# Altium PCB ESP Now Communicator PCB Apr 17 2026.pcbdoc
Units mil, origin at the board's own origin, x right, y up, seen from the top; angles counter-clockwise.
Board outline 2642.91 x 4033.37 mil, 2 copper layers (Top Layer, Bottom Layer); 40 components, 40 nets, 181 pads, 62 vias.
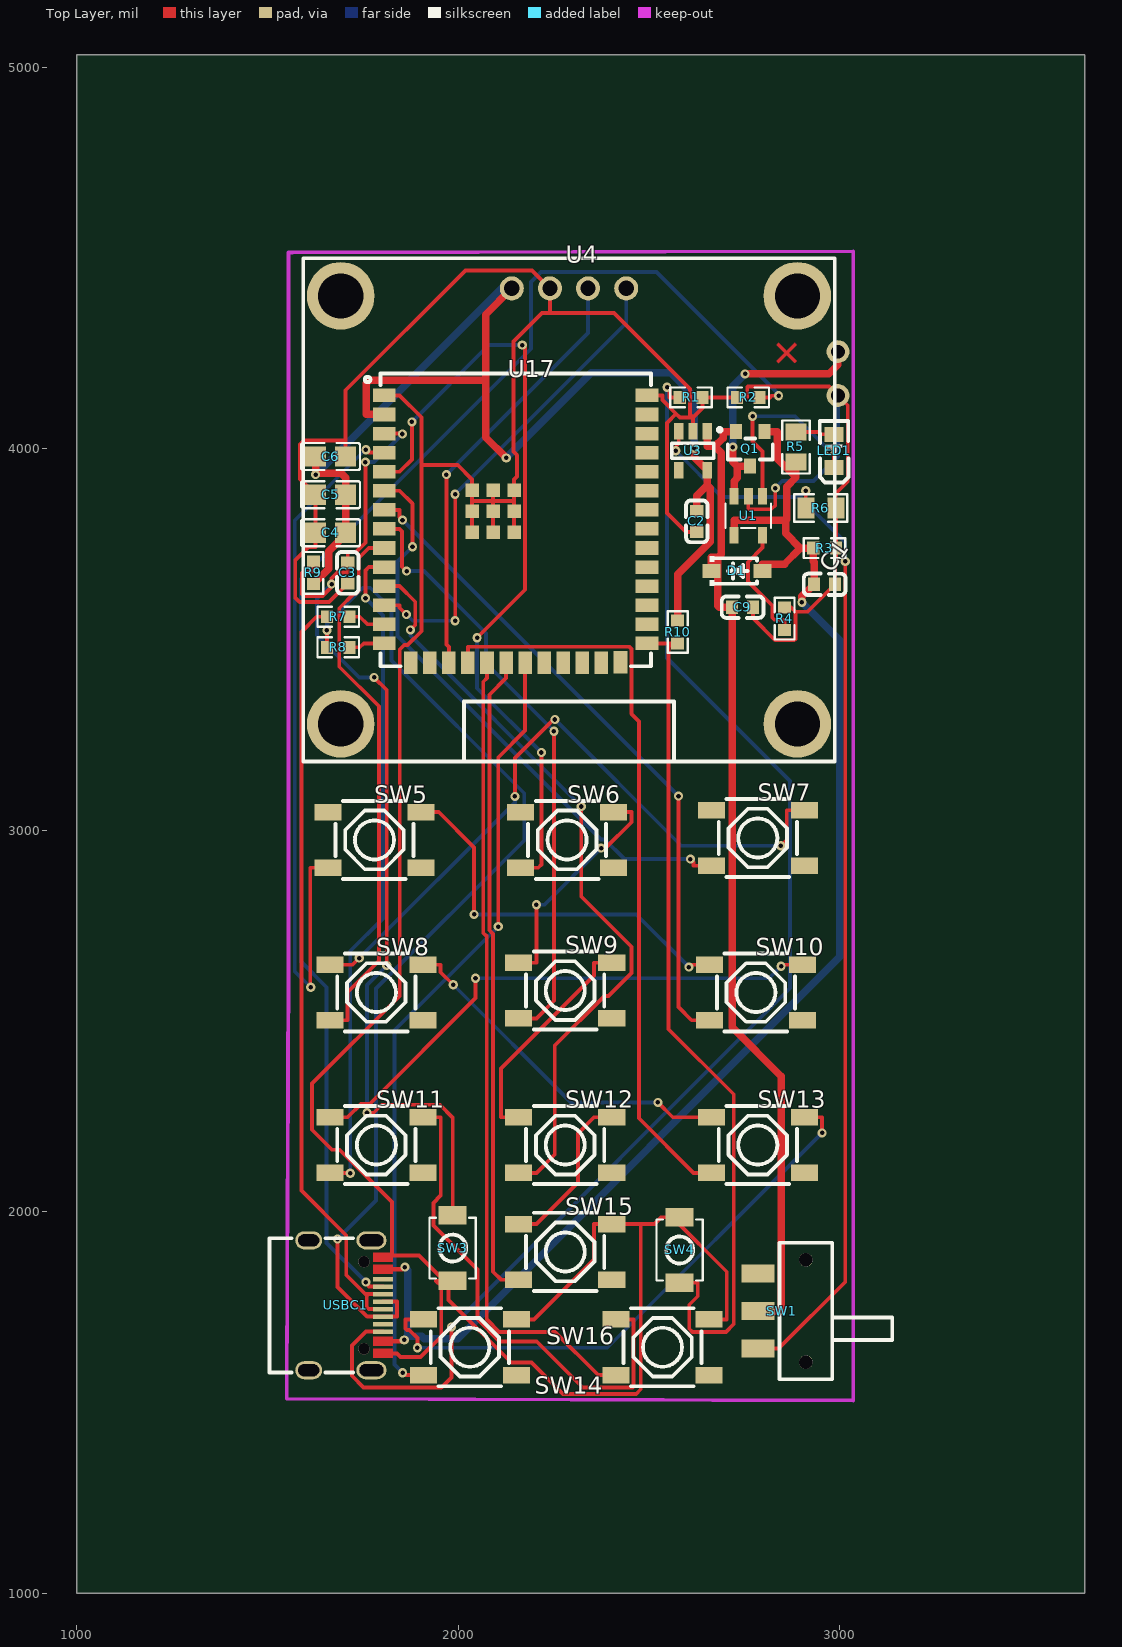
[diagram p0: Top Layer view]
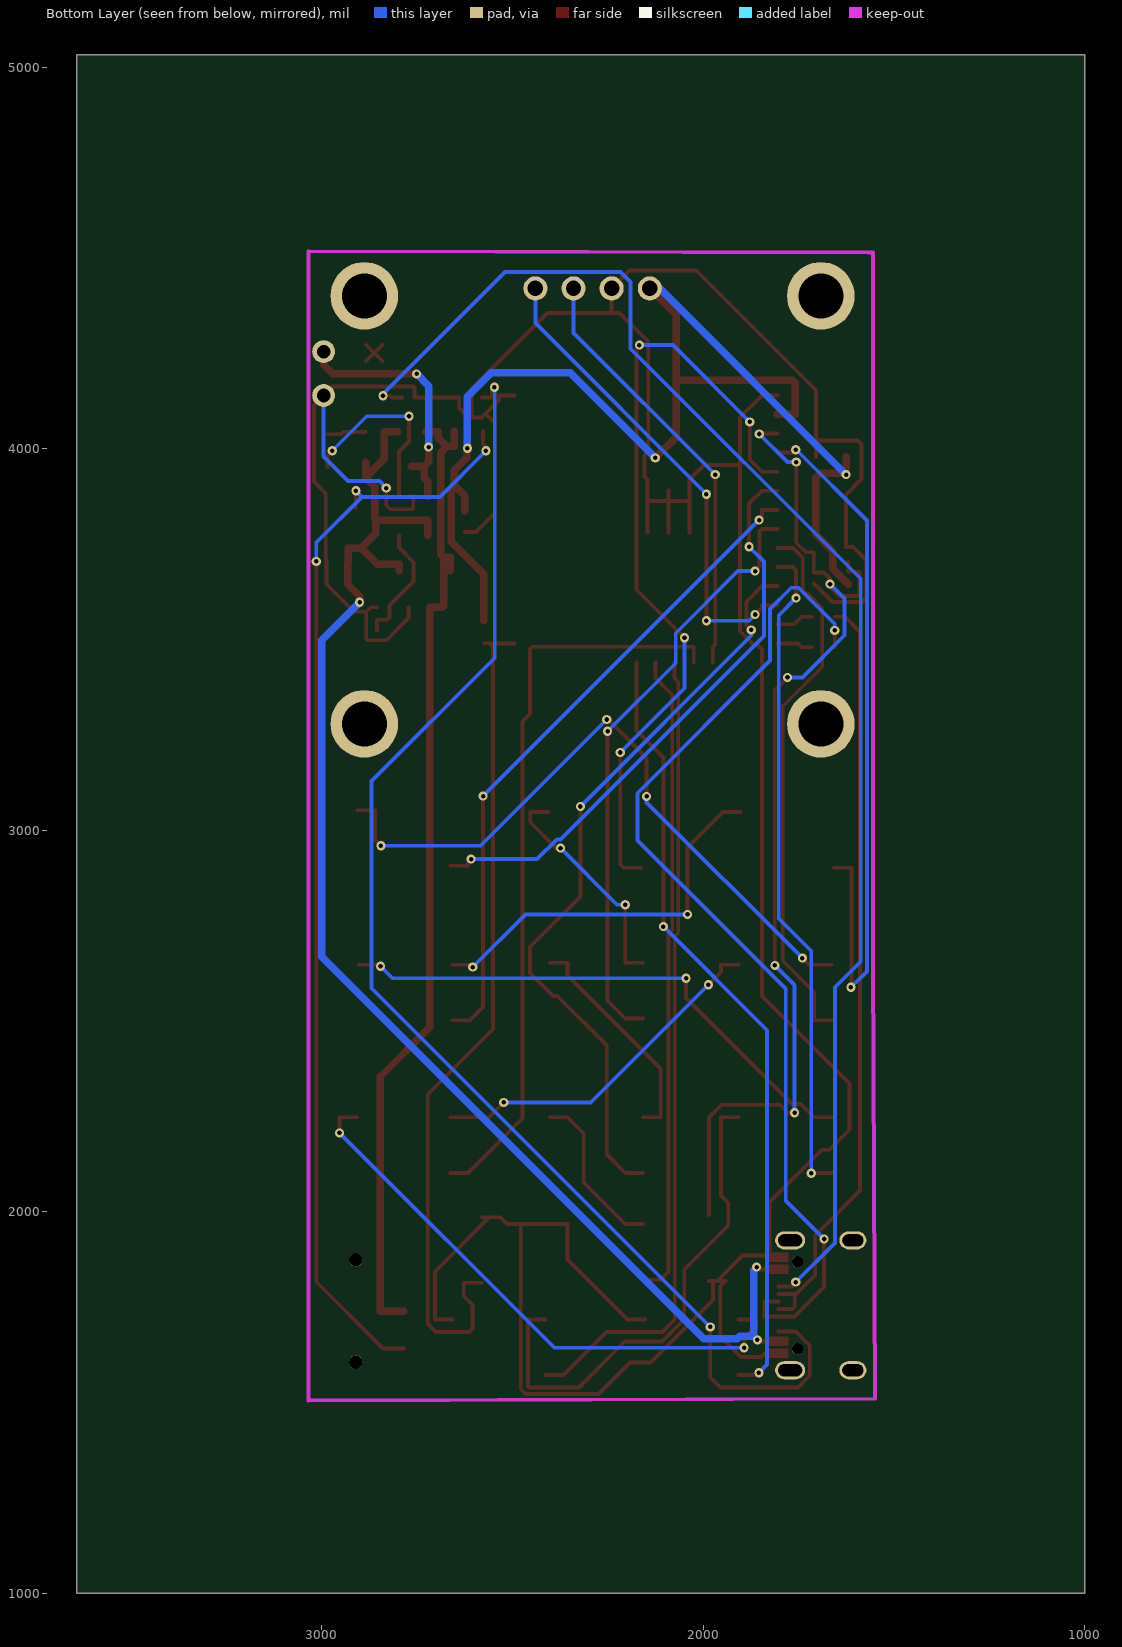
[diagram p1: Bottom Layer view, seen from below]

## Layer stack, top to bottom
Top Layer: signal copper (thickness not stored)
Dielectric: dielectric 12.6, FR-4, Dk 4.8
Bottom Layer: signal copper (thickness not stored)

## Board outline
3642.91,1000 1000,1000 1000,5033.37 3642.91,5033.37

## Components (designator, comment, footprint, x,y, rotation, side; value= is the part's Value field where it differs from the comment)
C1 "10uF" C0603 2960.55,3645 r0 top
C2 "22uF" C0603 2625.55,3810 r270 top
C3 "100nF" C0603 1710.56,3675 r90 top
C4 "10uF" C0805 1665.56,3780 r180 top
C5 "100nF" C0805 1665.56,3880 r180 top
C6 "47uF" C0805 1665.56,3980 r180 top
C9 "10uF" C0603 2745.55,3585 r0 top
D1 "B5819W_C8598" SOD-123_L2.7-W1.6-LS3.7-RD-1 2730.55,3680 r0 top
LED1 "FC-2012HRK-620D" LED0805-RD 2985.55,3995 r90 top
Q1 "AO3401A" SOT-23_L2.9-W1.3-P1.90-LS2.4-BR 2765.55,4000 r90 top
R1 "5.1kΩ" R0603 2610.55,4135 r180 top
R2 "5.1kΩ" R0603 2760.55,4135 r0 top
R3 "100kΩ" R0603 2960.55,3740 r0 top
R4 "2kΩ" R0603 2855.55,3555 r90 top
R5 "1kΩ" R0805 2885.55,4005 r90 top
R6 "100kΩ" R0805 2950.55,3845 r0 top
R7 "22Ω" R0603 1685.56,3560 r0 top
R8 "22Ω" R0603 1685.56,3480 r0 top
R9 "10kΩ" R0603 1620.56,3675 r90 top
R10 "10kΩ" R0603 2575.55,3520 r270 top
SW1 "MST-12D18G4 SPDT SLIDE SWITCH" SW-SMD_MST-12D18G4-SPDT-SLIDE-SWITCH 2785.55,1740 r90 top
SW3 "TS-1088-AR02016" SW-SMD_L3.9-W3.0-P4.45 1985.56,1905 r90 top
SW4 "TS-1088-AR02016" SW-SMD_L3.9-W3.0-P4.45 2580.55,1900 r90 top
SW5 "4*4*1.7" SW-SMD_4P-L5.2-W5.2-P3.70-LS6.5 1780.56,2975 r0 top
SW6 "4*4*1.7" SW-SMD_4P-L5.2-W5.2-P3.70-LS6.5 2285.55,2975 r0 top
SW7 "4*4*1.7" SW-SMD_4P-L5.2-W5.2-P3.70-LS6.5 2785.55,2980 r0 top
SW8 "4*4*1.7" SW-SMD_4P-L5.2-W5.2-P3.70-LS6.5 1785.56,2575 r0 top
SW9 "4*4*1.7" SW-SMD_4P-L5.2-W5.2-P3.70-LS6.5 2280.55,2580 r0 top
SW10 "4*4*1.7" SW-SMD_4P-L5.2-W5.2-P3.70-LS6.5 2780.55,2575 r0 top
SW11 "4*4*1.7" SW-SMD_4P-L5.2-W5.2-P3.70-LS6.5 1785.56,2175 r0 top
SW12 "4*4*1.7" SW-SMD_4P-L5.2-W5.2-P3.70-LS6.5 2280.55,2175 r0 top
SW13 "4*4*1.7" SW-SMD_4P-L5.2-W5.2-P3.70-LS6.5 2785.55,2175 r0 top
SW14 "4*4*1.7" SW-SMD_4P-L5.2-W5.2-P3.70-LS6.5 2030.56,1645 r0 top
SW15 "4*4*1.7" SW-SMD_4P-L5.2-W5.2-P3.70-LS6.5 2280.55,1895 r0 top
SW16 "4*4*1.7" SW-SMD_4P-L5.2-W5.2-P3.70-LS6.5 2535.55,1645 r0 top
U1 "TP4054A" SOT-23-5_L2.9-W1.6-P0.95-LS2.8-TL 2760.55,3825 r270 top
U3 "AP2112K-3.3TRG1" SOT-25-5_L2.9-W1.6-P0.95-LS2.8-BL 2615.55,3995 r180 top
U4 "1.3Inch I2C OLED MODULE" "OLED 1.3 INCH" 2290.55,3850 r0 top
U17 "ESP32-S3-WROOM-1U-N8" WIRELM-SMD_ESP32-S3-WROOM-1U 2150.55,3790 r0 top
USBC1 "TYPE-C-31-M-12" USB-C_SMD-TYPE-C-31-M-12_1 1705.56,1755 r270 top

## Footprints (in the part's own frame and the unit in brackets; to place one, negate y for a bottom-side part, rotate by r counter-clockwise, add the part's x,y. Pads: shape width x height; smd on the part's side, far side on the other; paste and mask are expansions set on the pad)
C0603 [mm]
  rect 0.8x0.9 smd paste+0 mask+0.051: 1(-0.7,0) 2(0.7,0)
  silkscreen extent -1.39,-0.71 1.39,0.71
C0805 [mm]
  rect 1.41x1.35 smd paste-100 mask+0.051: 1(-1,0) 2(1,0)
  silkscreen extent -1.96,-0.9 1.96,0.9
LED0805-RD [mm]
  rect 1x1.25 smd paste+0 mask+0.051: 1(-1.1,0) 2(1.1,0)
  silkscreen extent -2.1,-0.95 1.98,0.96
"OLED 1.3 INCH" [mm]
  round 1.6 hole 1.02 paste+0 mask+0.102: 1(-3.81,14.5) 2(-1.27,14.5) 3(1.27,14.5) 4(3.81,14.5)
  round 4.5 hole 3 paste+0 mask+0.102: 5(-15.2,14) 6(15.2,14) 7(-15.2,-14.5) 8(15.2,-14.5)
  silkscreen extent -17.7,-17 17.7,16.5
R0603 [mil]
  rect 31.75x34.02 smd paste-3937.01 mask+2: 1(-29.66,0) 2(29.65,0)
  silkscreen extent -55,-26 55,26
R0805 [mil]
  rect 44.59x54.21 smd paste-3937.01 mask+2: 1(-39.37,0) 2(39.37,0)
  silkscreen extent -69,-36 69,36
SOD-123_L2.7-W1.6-LS3.7-RD-1 [mm]
  rect 1.2x0.95 smd paste+0 mask+0.051: 1(-1.7,0) 2(1.7,0)
  silkscreen extent -1.81,-0.98 1.35,0.98
SOT-23-5_L2.9-W1.6-P0.95-LS2.8-TL [mm]
  rect 1.1x0.6 smd paste+0 mask+0.05: 1(-1.3,0.95) 2(-1.3,0) 3(-1.3,-0.95) 4(1.3,-0.95) 5(1.3,0.95)
  silkscreen extent -0.81,-1.51 0.82,1.51
SOT-23_L2.9-W1.3-P1.90-LS2.4-BR [mm]
  rect 1x0.8 smd paste+0 mask+0.051: 1(1.15,-0.95) 2(1.15,0.95) 3(-1.15,0)
  silkscreen extent -0.7,-1.5 0.7,1.5
SOT-25-5_L2.9-W1.6-P0.95-LS2.8-BL [mil]
  rect 24.5x43.5 smd paste+0 mask+2: 1(-37.39,-51.18) 2(-0.03,-51.18) 3(37.39,-51.18) 4(37.39,51.18) 5(-37.39,51.18)
  silkscreen extent -75,-60 56,20
SW-SMD_4P-L5.2-W5.2-P3.70-LS6.5 [mm]
  rect 1.8x1.1 smd paste+0 mask+0.051: 1(-3.1,1.85) 2(3.1,1.85) 3(-3.1,-1.85) 4(3.1,-1.85)
  silkscreen extent -2.6,-2.6 2.6,2.6
SW-SMD_L3.9-W3.0-P4.45 [mm]
  rect 1.23x1.86 smd paste+0 mask+0.051: 1(-2.185,0) 2(2.185,0)
  silkscreen extent -2.03,-1.54 2.03,1.54
SW-SMD_MST-12D18G4-SPDT-SLIDE-SWITCH [mm]
  rect 1.2x2.2 smd paste+0 mask+0.051: 1(-2.5,0) 2(0,0) 3(2.5,0)
  round 0.9 hole 0.9 unplated paste+0: ""(-3.4,-3.2) ""(3.4,-3.2)
  silkscreen extent -4.55,-8.95 4.55,-1.45
USB-C_SMD-TYPE-C-31-M-12_1 [mm]
  oval 1.2x2 hole 0.8 slot 1.6 at 90 deg paste+0 mask+0.051: 1(4.325,1.706) 4(-4.325,1.706)
  oval 1.2x1.8 hole 0.8 slot 1.4 at 90 deg paste+0 mask+0.051: 2(4.325,-2.474) 3(-4.325,-2.474)
  rect 0.3x1.3 smd paste-100 mask+0.051: A5(-1.25,2.474) A6(-0.25,2.474) A7(0.25,2.474) A8(1.25,2.474) B5(1.75,2.474) B6(0.75,2.474) B7(-0.75,2.474) B8(-1.75,2.474)
  round 0.75 hole 0.75 unplated paste+0: ""(-2.9,1.205) ""(2.9,1.205)
  Top Layer region: -2.9,1.824 -2.9,3.124 -2.9,3.124 -3.2,3.124 -3.2,3.124 -3.2,3.124 -3.2,3.124 -3.5,3.124 -3.5,3.124 -3.5,1.824 -3.5,1.824 -3.2,1.824 -3.2,1.824 -3.2,1.824 -3.2,1.824
  Top Layer region: 2.9,3.124 2.9,1.824 2.9,1.824 3.2,1.824 3.2,1.824 3.2,1.824 3.2,1.824 3.5,1.824 3.5,1.824 3.5,3.124 3.5,3.124 3.2,3.124 3.2,3.124 3.2,3.124 3.2,3.124
  Top Layer region: 2.7,1.824 2.7,3.124 2.7,3.124 2.4,3.124 2.4,3.124 2.4,3.124 2.4,3.124 2.1,3.124 2.1,3.124 2.1,1.824 2.1,1.824 2.4,1.824 2.4,1.824 2.4,1.824 2.4,1.824
  Top Layer region: -2.1,1.824 -2.1,3.124 -2.1,3.124 -2.4,3.124 -2.4,3.124 -2.4,3.124 -2.4,3.124 -2.7,3.124 -2.7,3.124 -2.7,1.824 -2.7,1.824 -2.4,1.824 -2.4,1.824 -2.4,1.824 -2.4,1.824
  silkscreen extent -4.47,-5.09 4.47,0.49
WIRELM-SMD_ESP32-S3-WROOM-1U [mm]
  rect 1.5x0.9 smd paste+0 mask+0.05: 1(-8.75,8.895) 2(-8.75,7.625) 3(-8.75,6.355) 4(-8.75,5.085) 5(-8.75,3.815) 6(-8.75,2.545) 7(-8.75,1.275) 8(-8.75,0.005) 9(-8.75,-1.265) 10(-8.75,-2.535) 11(-8.75,-3.805) 12(-8.75,-5.075) 13(-8.75,-6.345) 14(-8.75,-7.615) 27(8.75,-7.615) 28(8.75,-6.345) 29(8.75,-5.075) 30(8.75,-3.805) 31(8.75,-2.535) 32(8.75,-1.265) 33(8.75,0.005) 34(8.75,1.275) 35(8.75,2.545) 36(8.75,3.815) 37(8.75,5.085) 38(8.75,6.355) 39(8.75,7.625) 40(8.75,8.895)
  rect 0.9x1.5 smd paste+0 mask+0.05: 15(-6.985,-8.895) 16(-5.715,-8.895) 17(-4.445,-8.895) 18(-3.175,-8.895) 19(-1.905,-8.895) 20(-0.635,-8.895) 21(0.635,-8.895) 22(1.905,-8.895) 23(3.175,-8.895) 24(4.445,-8.895) 25(5.715,-8.895) 26(6.985,-8.865)
  rect 0.9x0.9 smd paste+0 mask+0.051: 41(-2.9,-0.225) 41(-2.9,1.175) 41(-2.9,2.575) 41(-1.501,-0.225) 41(-1.501,1.175) 41(-1.501,2.575) 41(-0.1,-0.225) 41(-0.1,1.175) 41(-0.1,2.575)
  silkscreen extent -10.04,-9.14 9.02,10.36

## Free pads (board coordinates)
  round 60 hole 36 paste+0 mask+2: 1(2995.55,4255) 2(2995.55,4140)

## Via types
v1: diameter 24.02, hole 12.01, Top Layer to Bottom Layer, tented both sides, 54 vias
v2: diameter 24.02, hole 11.81, Top Layer to Bottom Layer, tented both sides, 8 vias

## Nets (pads, with @x,y where several pads share a name; then routed paths per layer and width w, separated by ;. In a path a pad name is that pad's centre, name@x,y a point inside that pad or via, vN(x,y) a via of type N, cw(c..) or ccw(c..) an arc to the next point about the centre after c; other vN are vias at no path point)
+5V: C1.1 D1.2 Q1.1 R3.1 R5.1 U1.4 | length 3761.4
  Top Layer w11.81: 1802.95,1660.5 1854.72,1660.5 v2(1858.64,1664.42) ; 1802.96,1849.49 1855.05,1849.49 v2(1860.56,1855)
  Top Layer w19.68: U1.4 2723.16,3793.51 2723.16,3813.2 2858.72,3813.2 ; D1.2 2797.49,3698.22 2855.51,3698.22 2897.3,3740 ; Q1.1 2836.43,4045.28 2836.43,3974.72 2885.55,3925.6 ; R5.1 2885.55,3925.6 ; v2(2901.18,3597.8) 2901.18,3613.19 C1.1 2932.99,3703.16 2930.89,3705.26 R3.1 2897.3,3740 ; 2858.72,3813.2 2861.2,3815.68 2861.2,3901.24 2885.55,3925.6 ; 2858.72,3813.2 2858.72,3778.58 2897.3,3740
  Bottom Layer w19.68: v2(1858.64,1664.42) 1868.37,1674.14 ; v2(1860.56,1855) 1868.36,1847.19 1868.36,1674.14 ; v2(2901.18,3597.8) 3000.7,3498.29 3000.7,2668.75 1999.54,1667.59 1911.4,1667.59 1904.86,1674.14 1868.37,1674.14
BATTERY+: pad.1 Q1.3 U1.3 | length 663.7
  Top Layer w19.68: v2(2720.36,4004.86) 2720.36,3966.43 2732.07,3954.72 ; U1.3 2723.16,3915.56 2732.07,3924.48 2732.07,3954.72 ; v2(2752.01,4196.47) 2972.07,4196.47 2995.55,4219.96 pad.1 ; Q1.3 2739.97,3954.72 2734.05,3954.72 2733.07,3954.72 2732.07,3954.72
  Bottom Layer w19.68: v2(2720.36,4004.86) 2720.36,4164.82 v2(2752.01,4196.47)
BTN1: SW5.3 U17.4 | length 1916.4
  Top Layer w10: v1(1613.35,2588.58) 1612.09,2589.84 1612.09,2902.17 SW5.3 ; v1(1758.04,3997.77) 1765.55,3990.26 1765.55,3990.2 U17.4
  Bottom Layer w10: v1(1613.35,2588.58) 1571.52,2630.41 1571.52,3812.72 1756.57,3997.77 v1(1758.04,3997.77)
BTN2: SW6.3 U17.5 | length 2101.9
  Top Layer w10: U17.5 1846.59,3940.2 1878.58,3972.19 v1(1878.58,4070.8) ; v1(2049.66,3504.92) 2175.39,3630.66 2175.39,4264.6 v1(2167.78,4272.22) ; SW6.3 2209.93,2902.17 2218.12,2910.36 v1(2218.12,3204.08)
  Bottom Layer w10: v1(1878.58,4070.8) 2079.99,4272.22 v1(2167.78,4272.22) ; v1(2049.66,3504.92) 2049.66,3372.55 v1(2218.12,3204.08)
BTN3: SW7.3 U17.6 | length 1528.6
  Top Layer w10: U17.6 1846.59,3890.2 1880.36,3856.43 v1(1880.36,3743.59) ; v1(2608.93,2924.76) 2617.09,2916.6 2617.09,2907.17 SW7.3
  Bottom Layer w10: v1(1880.36,3743.59) 1841.26,3704.49 1841.26,3509.54 2374.34,2976.45 2384.14,2976.45 2435.84,2924.76 v1(2608.93,2924.76)
BTN4: SW10.3 U17.7 | length 1742.1
  Top Layer w10: U17.7 1846.59,3840.2 1846.59,3820.85 v1(1854.11,3813.33) ; v1(2577.61,3089.82) 2577.61,2536.64 2612.09,2502.17 SW10.3
  Bottom Layer w10: v1(1854.11,3813.33) v1(2577.61,3089.82)
BTN5: SW9.3 U17.8 | length 1583.2
  Top Layer w10: U17.8 1846.59,3790.2 1853.13,3783.65 1853.13,3691.13 v1(1864.66,3679.6) ; SW9.3 2204.93,2507.17 2251.09,2553.33 v1@2251.09,3259.65
  Bottom Layer w10: v1(1864.66,3679.6) 1910.03,3679.6 2072.72,3516.91 2072.72,3438.03 v1@2251.09,3259.65
  other v1: 2251.09,3259.65
BTN6: SW8.3 U17.9 | length 1437.6
  Top Layer w10: SW8.3 1709.93,2502.17 1709.93,2575.82 1792.12,2658 1792.12,3325.18 1688.29,3429.01 1688.29,3582.13 1726.66,3620.51 1732.72,3620.51 1739.38,3627.16 1739.38,3714.03 1765.55,3740.2 U17.9
BTN7: SW11.3 U17.10 | length 1741.7
  Top Layer w10: SW11.3 1709.93,2102.17 1711.09,2101.02 v1(1717.21,2101.02) ; v1(1756.98,3608.83) 1756.98,3681.64 1765.55,3690.2 U17.10
  Bottom Layer w10: v1(1717.21,2101.02) 1717.21,2683.63 1802.6,2769.01 1802.6,3563.22 v1(1756.98,3608.83)
BTN8: SW12.3 U17.11 | length 1997.2
  Top Layer w10: U17.11 1846.59,3640.2 1887.44,3599.34 1887.44,3538.26 v1(1874.64,3525.46) ; SW12.3 2204.93,2102.17 2253.2,2150.44 2253.2,2435.92 2383.18,2565.89 2394.47,2565.89 2454.24,2625.66 2454.24,2694.85 2322.55,2826.55 v1(2322.55,3062.61)
  Bottom Layer w10: v1(1874.64,3525.46) 1874.64,3510.51 v1(2322.55,3062.61)
BTN9: SW13.3 U17.18 | length 1959.3
  Top Layer w10: U17.18 2025.56,3480.32 2026.81,3481.57 2447.86,3481.57 2454.32,3475.1 2454.32,3305.48 2474.07,3285.73 2474.07,2245.18 2617.09,2102.17 SW13.3
BTN10: SW16.3 U17.19 | length 2128.8
  Top Layer w10: U17.19 2075.55,3399.28 2065.78,3389.51 2065.78,2731.35 2075.14,2722 2075.14,1717.43 2107.43,1685.13 2254.12,1685.13 2367.09,1572.17 SW16.3
BTN11: SW15.3 U17.20 | length 1694.7
  Top Layer w10: U17.20 2125.55,3399.28 2081.84,3355.56 2081.84,2738 2091.18,2728.65 2091.18,1843.07 2112.09,1822.17 SW15.3
BTN12: SW14.3 U17.21 | length 2068.9
  Top Layer w10: v1(1854.48,1578.07) 1856.18,1578.07 1862.09,1572.17 SW14.3 ; v1(2104.89,2747.55) 2104.89,3190.85 2175.55,3261.51 U17.21
  Bottom Layer w10: v1(1854.48,1578.07) 1833.14,1599.41 1833.14,2475.8 v1(2104.89,2747.55)
DISPLAY_SCL: U4.3 U17.17 | length 1137.7
  Top Layer w10: v1(1969.05,3932.52) 1969.05,3486.83 1975.56,3480.32 U17.17
  Bottom Layer w10: v1(1969.05,3932.52) 2340.57,4304.04 U4.3
DISPLAY_SDA: U4.4 U17.12 | length 1264
  Top Layer w10: U17.12 1846.59,3590.2 1846.59,3583.61 v1(1864.38,3565.81) ; v1@1992.11,3549.45 v1(1992.11,3881.22)
  Bottom Layer w10: v1(1864.38,3565.81) 1880.74,3549.45 v1@1992.11,3549.45 ; v1(1992.11,3881.22) 2440.57,4329.68 U4.4
  other v1: 1992.11,3549.45
GND: C1.2 C2.2 C3.1 C4.2 C5.2 C6.1 C9.2 pad.2 R1.1 R2.1 R3.2 R4.2 R6.2 SW3.1 SW4.2 SW14.2 SW15.2 SW16.2 U1.2 U3.2 U4.2 U17.1 U17.40 U17.41 | length 10965.9
  Top Layer w10: C6.1 1704.92,3998.79 1704.92,4022 ; C3.1 1661.81,3598.69 1584.46,3598.69 1572.68,3610.47 1572.68,3707.72 1607.4,3742.44 1626.18,3742.44 C4.2 C5.2 1585.38,3920.81 1585.38,4012 1595.38,4022 1704.92,4022 ; 1802.95,1629.01 1839.55,1629.01 1849.11,1619.45 1901.64,1619.45 1955.82,1673.62 1955.82,1805.09 1941.92,1818.98 SW3.1@1963.74,1818.98 ; 1802.95,1880.98 1821.91,1880.98 1826.34,1885.4 ; U17.1 1846.59,4140.2 1903.78,4083.01 1903.78,3957.76 ; SW3.1 SW3.1@1974.65,1818.98 ; U17.41@2036.38,3781.14 2036.38,3836.25 2036.38,3863.81 ; U17.41@2091.49,3781.13 2091.49,3836.25 2091.49,3863.81 ; U17.41@2091.49,3891.37 2091.49,3863.81 ; U17.41@2146.61,3781.14 2146.61,3836.25 2146.61,3863.81 ; SW14.2 2175.82,1717.84 2199.03,1717.84 2356.18,1874.99 2356.18,1967.84 SW15.2 2478.78,1967.84 ; U17.40 2535.57,4140.2 2535.57,4127.93 2571.16,4092.34 ; SW4.2 SW4.2@2560.72,1986.02 ; U3.2 2615.59,4075.87 2615.59,4082.37 ; C2.2 2596.84,3782.44 2547.14,3832.14 2547.14,4068.33 2571.16,4092.34 ; SW16.2 2704.03,1717.84 2704.03,1842.72 SW4.2@2560.72,1986.02 ; U1.2 2760.55,3843.54 2762.47,3841.63 2820.82,3841.63 2831.45,3852.26 v1(2831.45,3897.38) ; C9.2 2773.11,3556.29 2830.99,3498.41 2881.05,3498.41 2883.95,3501.32 2883.95,3572.9 ; R4.2 2872.2,3584.66 2883.95,3572.9 ; R6.2 R6.2@2989.93,3864.05 ; 1704.92,4022 1704.92,4153.92 2018.82,4467.81 2193.62,4467.81 U4.2 2240.57,4356.62 ; 1826.34,1885.4 1826.34,2025.43 1689.02,2162.75 1669.63,2162.75 1617.02,2215.37 1617.02,2336.19 1846.79,2565.96 1846.79,3473.91 1858.62,3485.74 1867.55,3485.74 1903.78,3521.97 1903.78,3957.76 ; 1826.34,1885.4 1897.33,1885.4 SW3.1@1963.74,1818.98 ; 1903.78,3957.76 1998.69,3957.76 2036.38,3920.08 2036.38,3891.37 2036.38,3863.81 ; SW3.1@1963.74,1818.98 SW3.1@1974.65,1818.98 ; SW3.1@1974.65,1818.98 1974.65,1769.21 2138.99,1604.87 2192.61,1604.87 2274.74,1522.73 2466.8,1522.73 2478.78,1534.72 2478.78,1967.84 ; 2036.38,3863.81 2091.49,3863.81 ; 2091.49,3863.81 2146.61,3863.81 ; 2146.61,3863.81 2146.61,3891.37 2146.61,3920.08 2154.47,3927.93 2154.47,3983.59 2144.72,3993.34 2144.72,4281.77 2219.57,4356.62 2240.57,4356.62 ; 2240.57,4356.62 2408.32,4356.62 2607.84,4157.1 2607.84,4090.12 2615.59,4082.37 ; 2478.78,1967.84 2514.78,1967.84 2532.95,1986.02 SW4.2@2560.72,1986.02 ; 2571.16,4092.34 2581.12,4082.37 2615.59,4082.37 ; 2615.59,4082.37 2640.22,4107 R1.1 R2.1 2757.76,4135 2757.76,4161.87 2759.22,4163.33 2972.22,4163.33 pad.2 3021.22,4114.34 3021.22,3914.39 2989.93,3883.1 R6.2@2989.93,3864.05 ; 2883.95,3572.9 2916.01,3572.9 C1.2 2988.11,3709.9 2990.22,3712 R3.2 2990.22,3863.76 R6.2@2989.93,3864.05
  Bottom Layer w10: v1(2831.45,3897.38) 2849.57,3915.5 2931.64,3915.5 2996.09,3979.94 2996.09,4139.47 pad.2
LED1_2: LED1.2 R5.2 | length 102.5
  Top Layer w10: R5.2 2943.89,4044.37 2949.95,4038.31 LED1.2
R7_2: R7.2 U17.13 | length 99.1
  Top Layer w10: R7.2 1742.08,3560 1761.88,3540.2 U17.13
R8_2: R8.2 U17.14 | length 95.1
  Top Layer w10: R8.2 1742.08,3480 1752.28,3490.2 U17.14
R9_2: C3.2 R9.2 SW3.2 U17.3 | length 2794.5
  Top Layer w10: R9.2 1620.56,3677.79 1593.68,3677.79 1590.56,3674.66 1590.56,3619.83 1595.63,3614.75 1644.62,3614.75 1668.12,3638.25 v1(1668.12,3645.54) 1668.12,3660.13 1683.82,3675.82 1710.56,3675.82 C3.2 1710.56,3708.54 1710.56,3729.3 1731.92,3729.3 1756.8,3754.17 v1(1756.8,3965.39) ; v1(1760.92,2259.77) 1778.69,2259.77 1799.47,2280.55 1952.1,2280.55 1985.56,2247.09 SW3.2 ; v1(1779.54,3401.01) 1812.78,3367.77 v1@1812.78,2646.05 ; U17.3 1852.56,4040.2 v1(1853.67,4039.08)
  Bottom Layer w10: v1(1668.12,3645.54) 1630.19,3607.61 1630.19,3511.39 1740.58,3401.01 v1(1779.54,3401.01) ; v1(1756.8,3965.39) 1779.98,3965.39 v1(1853.67,4039.08) ; v1(1760.92,2259.77) 1760.92,2594.2 v1@1812.78,2646.05
  other v1: 1812.78,2646.05
R10_2: R10.2 SW4.1 U17.27 | length 2246.1
  Top Layer w10: U17.27 2547.41,3490.2 2547.55,3490.34 R10.2@2561.55,3490.34 ; R10.2 R10.2@2561.55,3490.34 ; SW4.1 2628.16,1813.98 2628.16,1778.78 2605.64,1756.27 2605.64,1693.5 2614.01,1685.13 2701.8,1685.13 2722.45,1705.79 2722.45,2308.07 2551.76,2478.77 2551.76,3480.54 R10.2@2561.55,3490.34
SW5_2: SW5.2 SW10.1 | length 1029.5
  Top Layer w10: SW5.2 1949.03,3047.84 2041.64,2955.22 v1(2041.64,2779.68) ; v1(2604.84,2641.67) 2611.01,2647.84 SW10.1
  Bottom Layer w10: v1(2041.64,2779.68) 2466.84,2779.68 v1(2604.84,2641.67)
SW6_2: SW6.2 SW9.1 | length 610.3
  Top Layer w10: SW9.1 2204.93,2652.84 v1(2204.93,2804.98) ; v1(2374.59,2953.39) 2386.2,2953.39 2454.03,3021.21 2454.03,3047.84 SW6.2
  Bottom Layer w10: v1(2204.93,2804.98) 2226.18,2804.98 v1(2374.59,2953.39)
SW7_2: SW7.2 SW8.1 | length 1800.1
  Top Layer w10: SW8.1 1723.37,2647.84 v1(1740.68,2665.16) ; v1(2148.84,3089.02) 2148.84,3190.01 2249.51,3290.67 v1(2253.57,3290.67) ; v1(2845.47,2959.47) 2861.18,2975.18 2861.18,3052.84 SW7.2
  Bottom Layer w10: v1(1740.68,2665.16) 2148.84,3073.32 v1(2148.84,3089.02) ; v1(2253.57,3290.67) 2584.78,2959.47 v1(2845.47,2959.47)
SW8_2: SW8.2 SW13.1 | length 933.1
  Top Layer w10: SW8.2 1954.03,2647.84 1954.03,2628.17 v1(1986.92,2595.27) ; v1(2523.47,2286.8) 2562.43,2247.84 SW13.1
  Bottom Layer w10: v1(1986.92,2595.27) 2295.39,2286.8 v1(2523.47,2286.8)
SW9_2: SW9.2 SW12.1 | length 599
  Top Layer w10: SW12.1 2112.09,2247.84 2112.09,2375.38 2356.18,2619.47 2356.18,2652.84 SW9.2
SW10_2: SW10.2 SW11.1 | length 1435.4
  Top Layer w10: SW11.1 1709.93,2247.84 1744.92,2282.83 1768.03,2282.83 2045.46,2560.27 v1(2045.46,2612.5) ; v1(2846.45,2643.95) 2852.28,2643.95 2856.18,2647.84 SW10.2
  Bottom Layer w10: v1(2045.46,2612.5) 2814.99,2612.5 v1(2846.45,2643.95)
SW11_2: SW11.2 SW16.1 | length 1338.6
  Top Layer w10: SW11.2 1954.03,2247.84 1954.1,2247.77 1954.1,2042.47 1934.99,2023.37 1934.99,1963.87 2050.34,1848.52 2050.34,1718.24 2108.74,1659.85 2206.07,1659.85 2326.47,1539.46 2457.09,1539.46 2460.01,1542.37 2460.01,1717.77 2459.93,1717.84 SW16.1
SW12_2: SW12.2 SW15.1 | length 435.5
  Top Layer w10: SW15.1 2204.93,1967.84 2313.91,2076.81 2313.91,2205.57 2356.18,2247.84 SW12.2
SW13_2: SW13.2 SW14.1 | length 1518.7
  Top Layer w10: v1(1893.23,1643.67) 1893.23,1668.96 1871.58,1690.62 1864.99,1690.62 1862.09,1693.53 1862.09,1717.84 SW14.1 ; SW13.2 2954.03,2247.84 v1(2954.03,2207.02)
  Bottom Layer w10: v1(1893.23,1643.67) 2390.68,1643.67 v1(2954.03,2207.02)
U1_1: LED1.1 U1.1 | length 507.3
  Top Layer w10: v1(2771.74,4085.39) 2771.74,4019.76 2797.95,3993.54 U1.1 ; v1(2973.01,3995) 2985.55,3982.46 LED1.1
  Bottom Layer w10: v1(2771.74,4085.39) 2882.62,4085.39 v1(2973.01,3995)
U1_5: R4.1 U1.5 | length 319.7
  Top Layer w10: U1.5 2797.95,3741.17 2759.76,3702.98 2759.76,3652.5 2823.18,3589.09 2823.18,3557.72 2828.68,3552.21 2855.55,3552.21 R4.1
U3_3: R6.1 SW1.1 U3.3 | length 2906.3
  Top Layer w10: v1(2570.2,3995) 2570.2,4005.48 2578.16,4013.44 U3.3 ; SW1.1 2839.84,1641.58 3014.93,1816.66 v1(3014.93,3705) ; R6.1 v1(2911.18,3890.17)
  Bottom Layer w10: v1(2570.2,3995) 2690.89,3874.32 2895.34,3874.32 ; v1(2911.18,3890.17) 2895.34,3874.32 ; v1(3014.93,3705) 3014.93,3754.73 2895.34,3874.32
USB-C+: R8.1 USBC1.A6 USBC1.B6 | length 2680.9
  Top Layer w10: R8.1 1655.89,3508 v1(1655.89,3524.27) ; v1(1683.69,1928.72) 1683.69,1803.19 1761.41,1725.47 USBC1.B6 1821.26,1725.47 1839.55,1725.47 1839.61,1725.53 1839.61,1764.78 1839.55,1764.84 USBC1.A6
  Bottom Layer w10: v1(1655.89,3524.27) 1655.89,3541.2 1750.64,3635.95 1769.71,3635.95 1825.2,3580.46 1825.2,3445.29 2173.09,3097.4 2173.09,2973.75 1784.4,2585.06 1784.4,2029.43 v1(1683.69,1928.72)
USB-C-: R7.1 USBC1.A7 USBC1.B7 | length 2015.5
  Top Layer w10: R7.1 1629.04,3560 1589.17,3520.14 1589.17,2055.85 1706.76,1938.27 1706.76,1834.32 1756.55,1784.53 1766.38,1784.53 ; USBC1.A7 1766.38,1745.16 1760.44,1751.1 1760.44,1778.59 1766.38,1784.53 ; USBC1.B7 1766.38,1784.53
USBC1_A5: R2.2 USBC1.A5 | length 3842
  Top Layer w10: v1(1757.93,1815.76) 1766.38,1807.31 1766.38,1804.21 USBC1.A5 ; R2.2 2817.07,4135 2821.61,4139.53 v1(2839.95,4139.54)
  Bottom Layer w10: v1(1757.93,1815.76) 1655.12,1918.57 1655.12,2588.59 1587.58,2656.14 1587.58,3659.4 2190.84,4262.66 2190.84,4437.45 2216.95,4463.56 2520.14,4463.56 2839.95,4143.76 v1(2839.95,4139.54)
USBC1_B5: R1.2 USBC1.B5 | length 3614.4
  Top Layer w10: USBC1.B5 1758.03,1686.1 1721.28,1649.35 1721.28,1570.16 1751.97,1539.46 1955.88,1539.46 1982.23,1565.82 v1(1982.23,1698.51) ; v1(2547.8,4161.81) 2554.03,4155.57 2554.03,4135 R1.2
  Bottom Layer w10: v1(1982.23,1698.51) 2869.72,2586 2869.72,3129.41 2547.14,3451.99 2547.14,4161.16 v1(2547.8,4161.81)
V_REGIN: C9.1 D1.1 Q1.2 SW1.2 U3.1 | length 2620.3
  Top Layer w19.68: U3.1 2652.95,4006.7 2672.84,4006.7 ; D1.1 2663.62,3716.43 2681.11,3716.43 ; Q1.2 2694.68,4045.28 2694.68,4028.54 2672.84,4006.7 ; SW1.2 2846.59,1740 2846.59,2354.75 2717.99,2483.34 C9.1 2684.51,3585 2681.11,3588.41 2681.11,3716.43 ; 2672.84,4006.7 2689.09,3990.45 2689.09,3724.41 2681.11,3716.43
VCC: C2.1 C4.1 C5.1 C6.2 R9.1 R10.1 U3.5 U4.1 U17.2 | length 3430.9
  Top Layer w19.68: R9.1 1660.76,3685.54 1660.76,3731.84 1704.92,3776.01 C4.1 C5.1 1704.92,3924.31 1693.54,3935.7 v2@1626.18,3935.7 ; v2(1626.18,3932.67) v2@1626.18,3935.7 ; C6.2 v2@1626.18,3935.7 ; U17.2 1758.81,4090.2 1758.81,4172.07 1766.59,4179.85 2071.7,4179.85 ; v2(2126.24,3976.59) 2071.7,4031.14 2071.7,4179.85 ; U4.1 2071.7,4352 2071.7,4179.85 ; R10.1 2575.55,3671.62 2661.01,3757.08 2661.01,3896.27 2652.95,3904.34 ; v2(2618.8,4001.87) 2618.8,3977.97 U3.5 2652.95,3904.34 ; C2.1 2625.55,3871.04 2625.55,3876.95 2652.95,3904.34
  Bottom Layer w19.68: v2(1626.18,3932.67) 2114.39,4420.87 U4.1 ; v2(2126.24,3976.59) 2348.88,4199.22 2556.68,4199.22 2618.8,4137.11 v2(2618.8,4001.87)
pads on no net: SW1. SW1.3 SW5.1 SW5.4 SW6.1 SW6.4 SW7.1 SW7.4 SW8.4 SW9.4 SW10.4 SW11.4 SW12.4 SW13.4 SW14.4 SW15.4 SW16.4 U3.4 U4.5 U4.6 U4.7 U4.8 U17.15 U17.16 U17.22 U17.23 U17.24 U17.25 U17.26 U17.28 U17.29 U17.30 U17.31 U17.32 U17.33 U17.34 U17.35 U17.36 U17.37 U17.38 U17.39 USBC1. USBC1.1 USBC1.2 USBC1.3 USBC1.4 USBC1.A8 USBC1.B8

## Other copper
Top Layer:
  text "+" at 2918.84,4243.28 h80 r135